# Altium PCB TG21_mach_nut_nhan _V1_ReV.PcbDoc (part 1 of 5)
Units mm, origin at the board's own origin, x right, y up, seen from the top; angles counter-clockwise.
Board outline 300 x 245 mm, 2 copper layers (Top Layer, Bottom Layer), stack 1.671 mm thick; 534 components, 407 nets, 1677 pads, 2608 vias.
Unrouted connection lines stored in the file: 3.
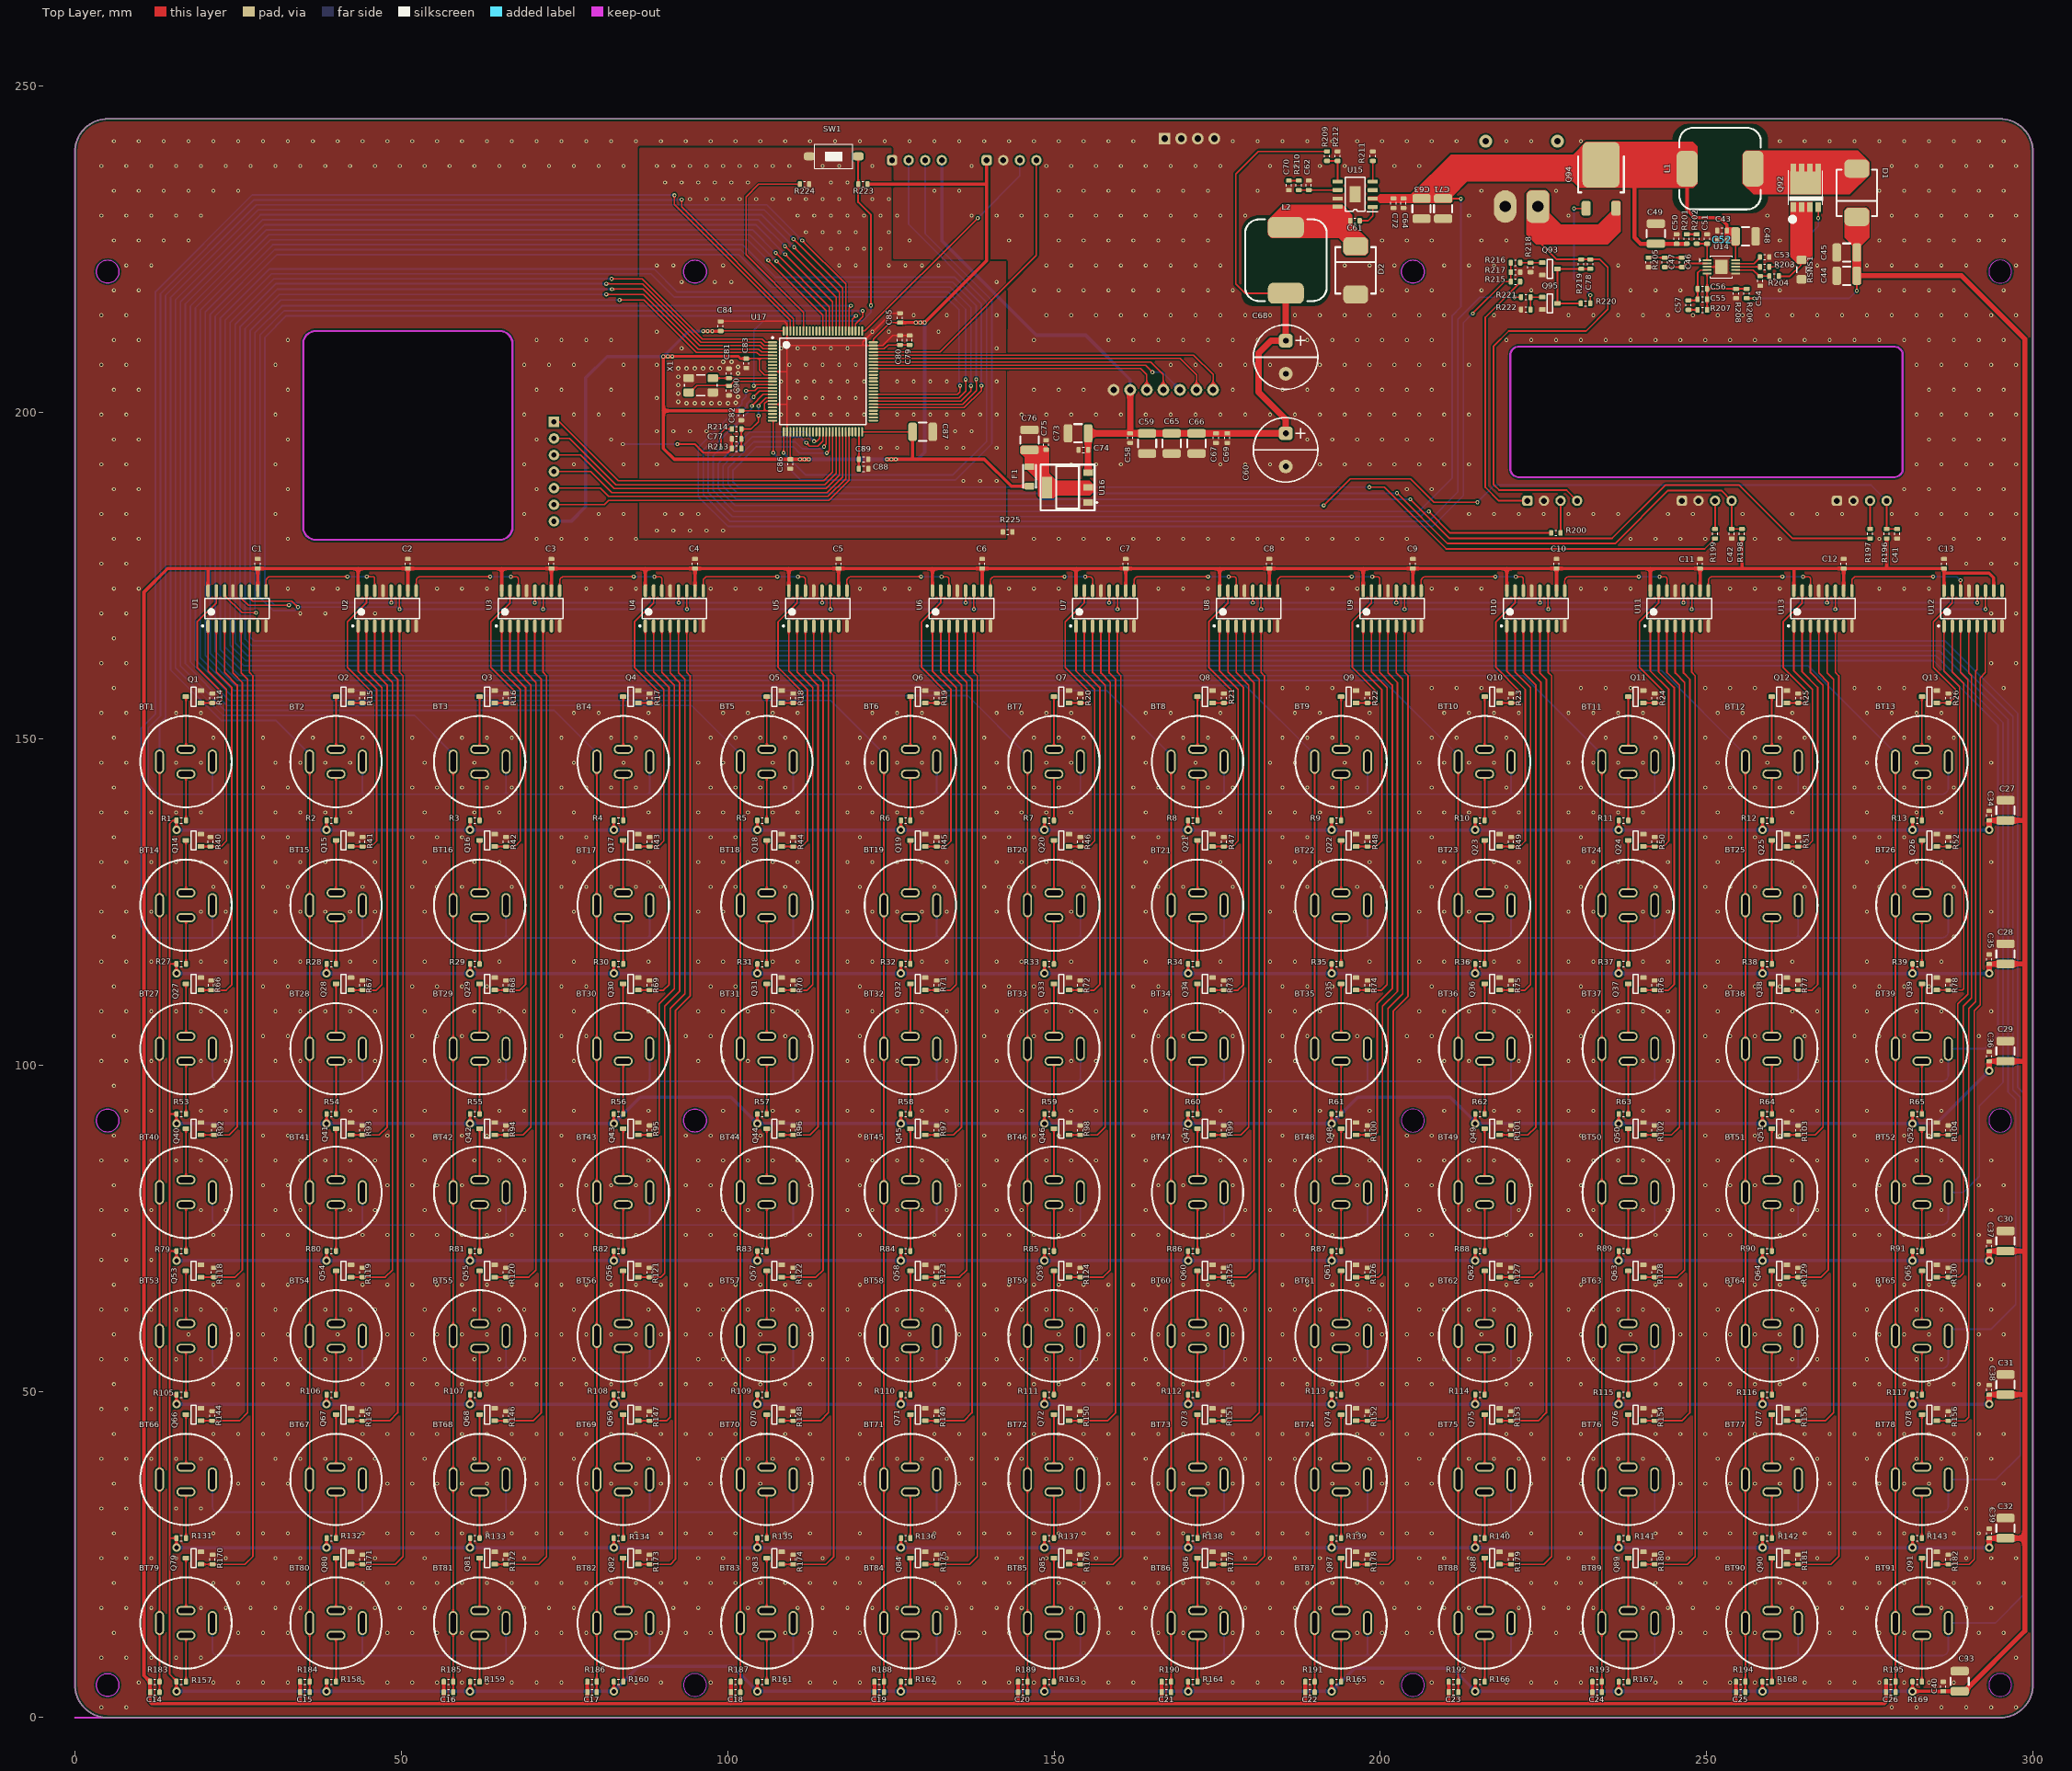
[diagram p0: Top Layer view]
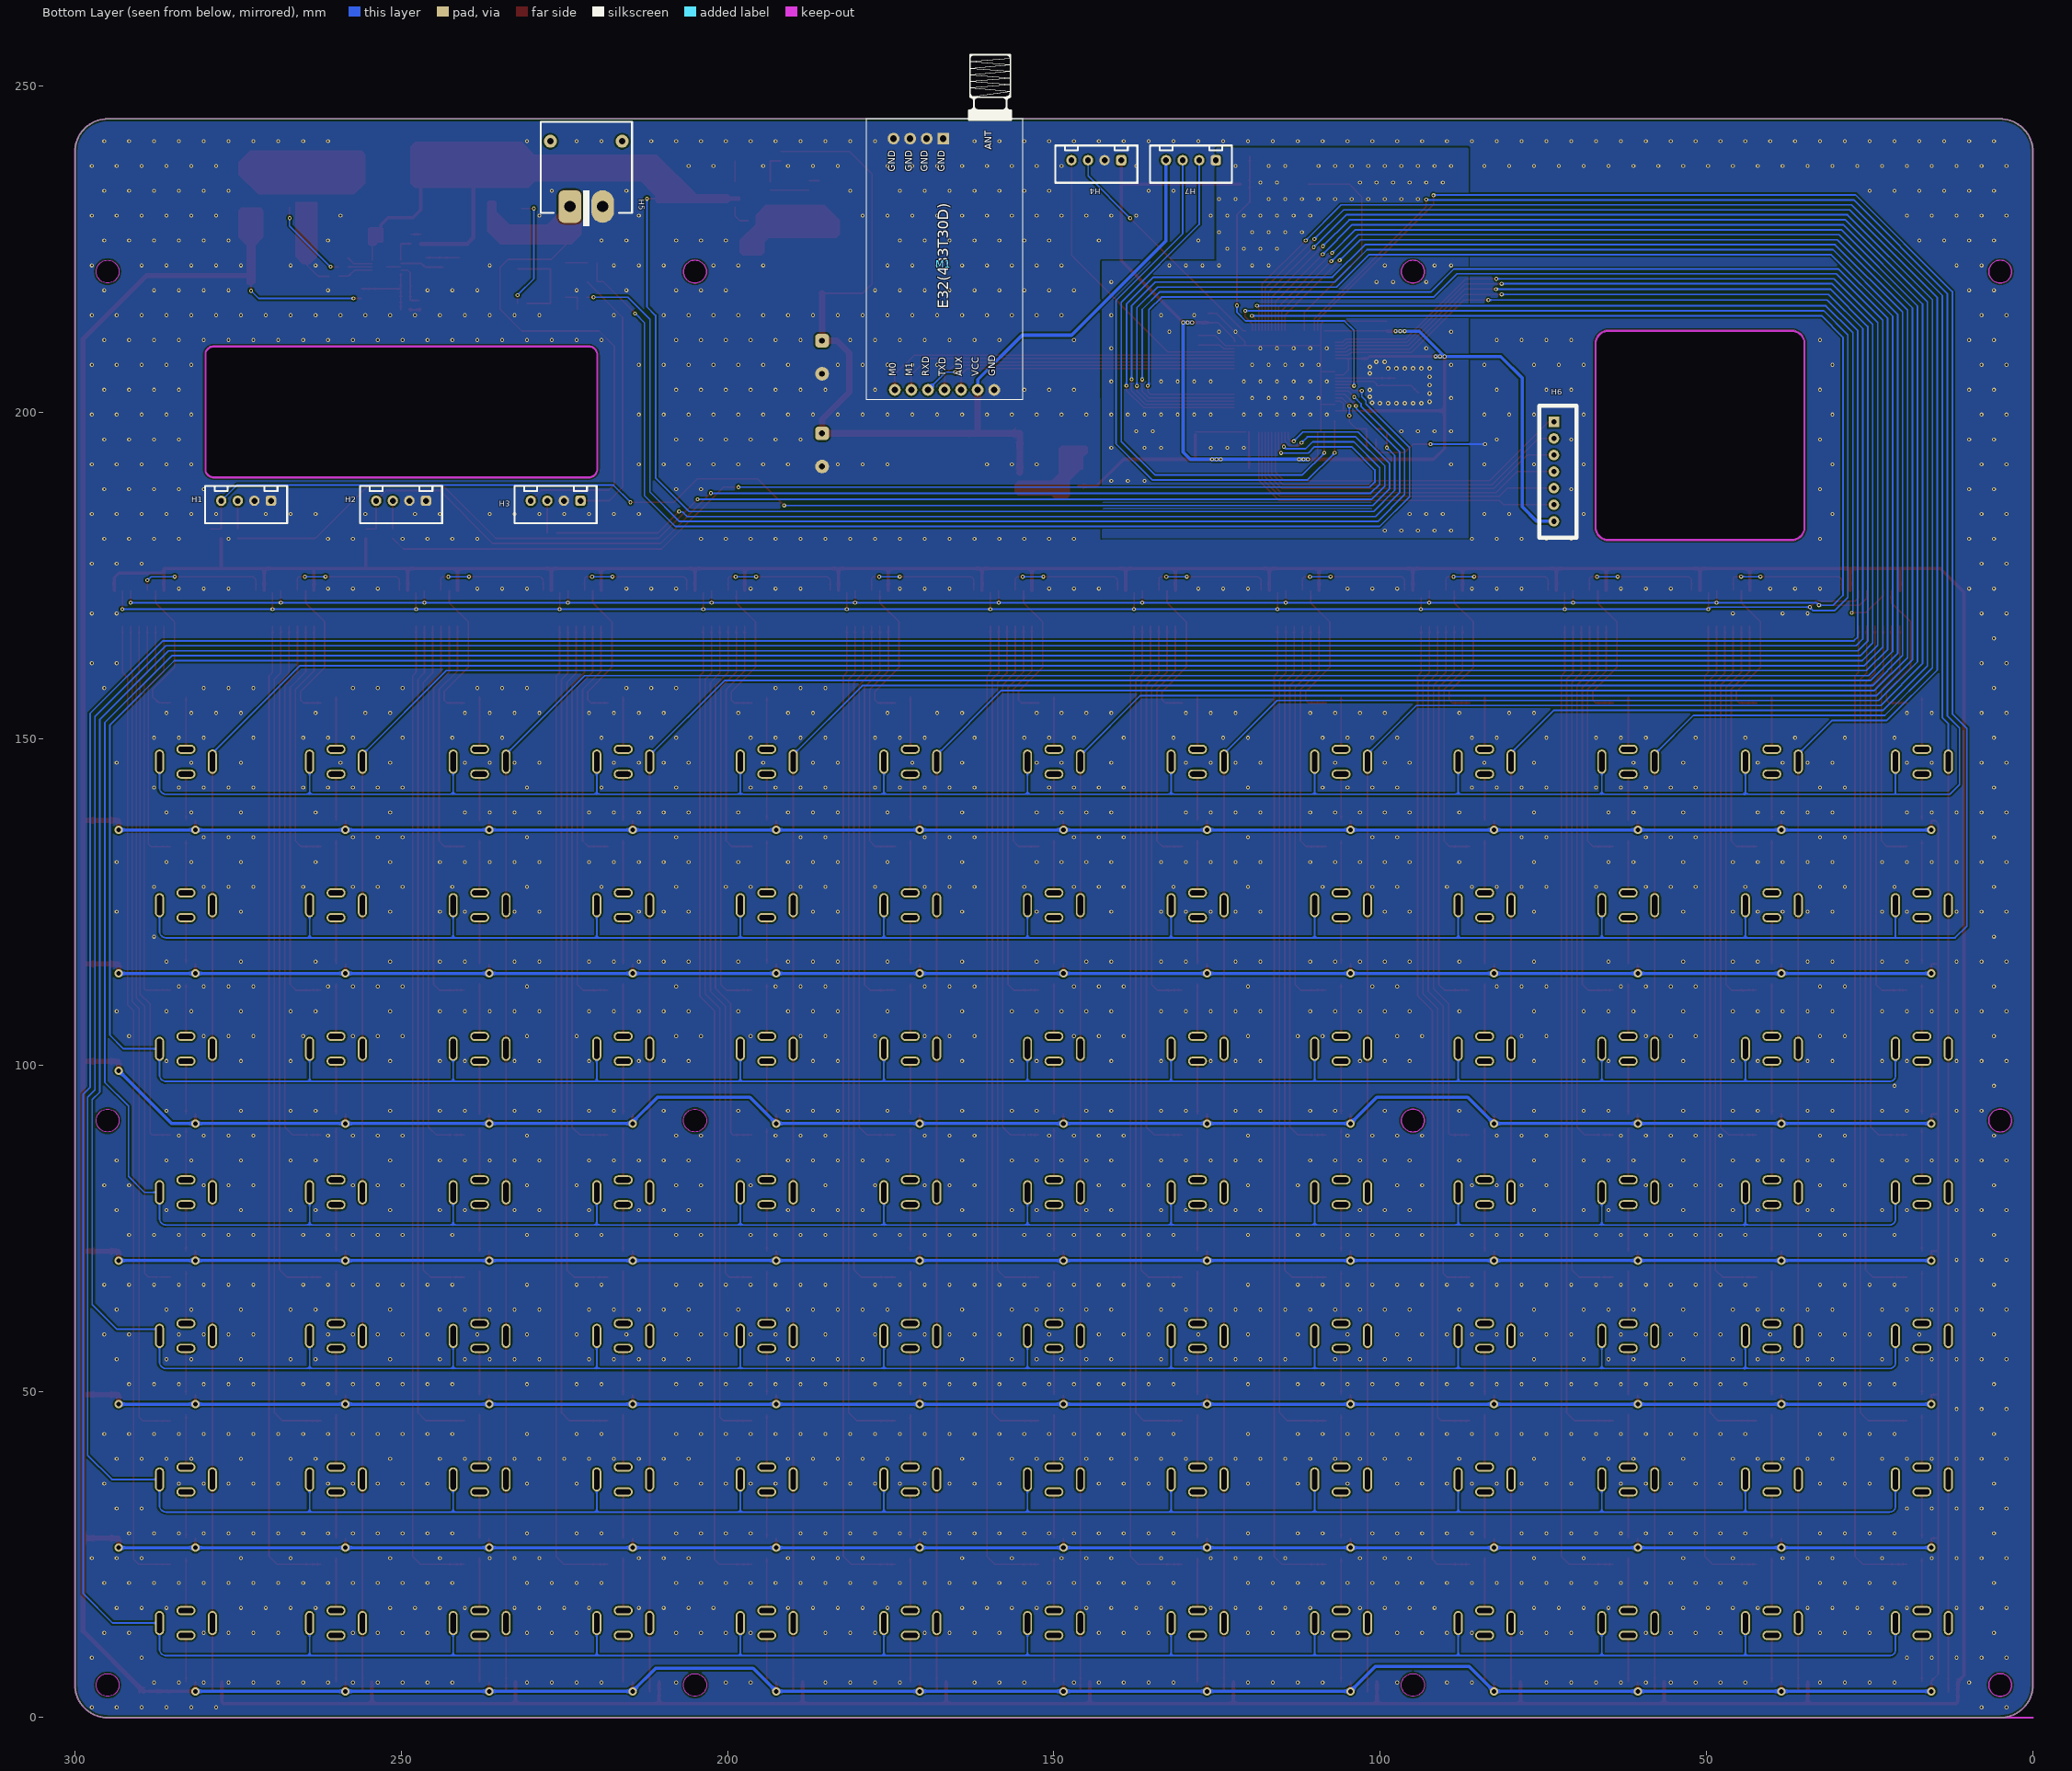
[diagram p1: Bottom Layer view, seen from below]
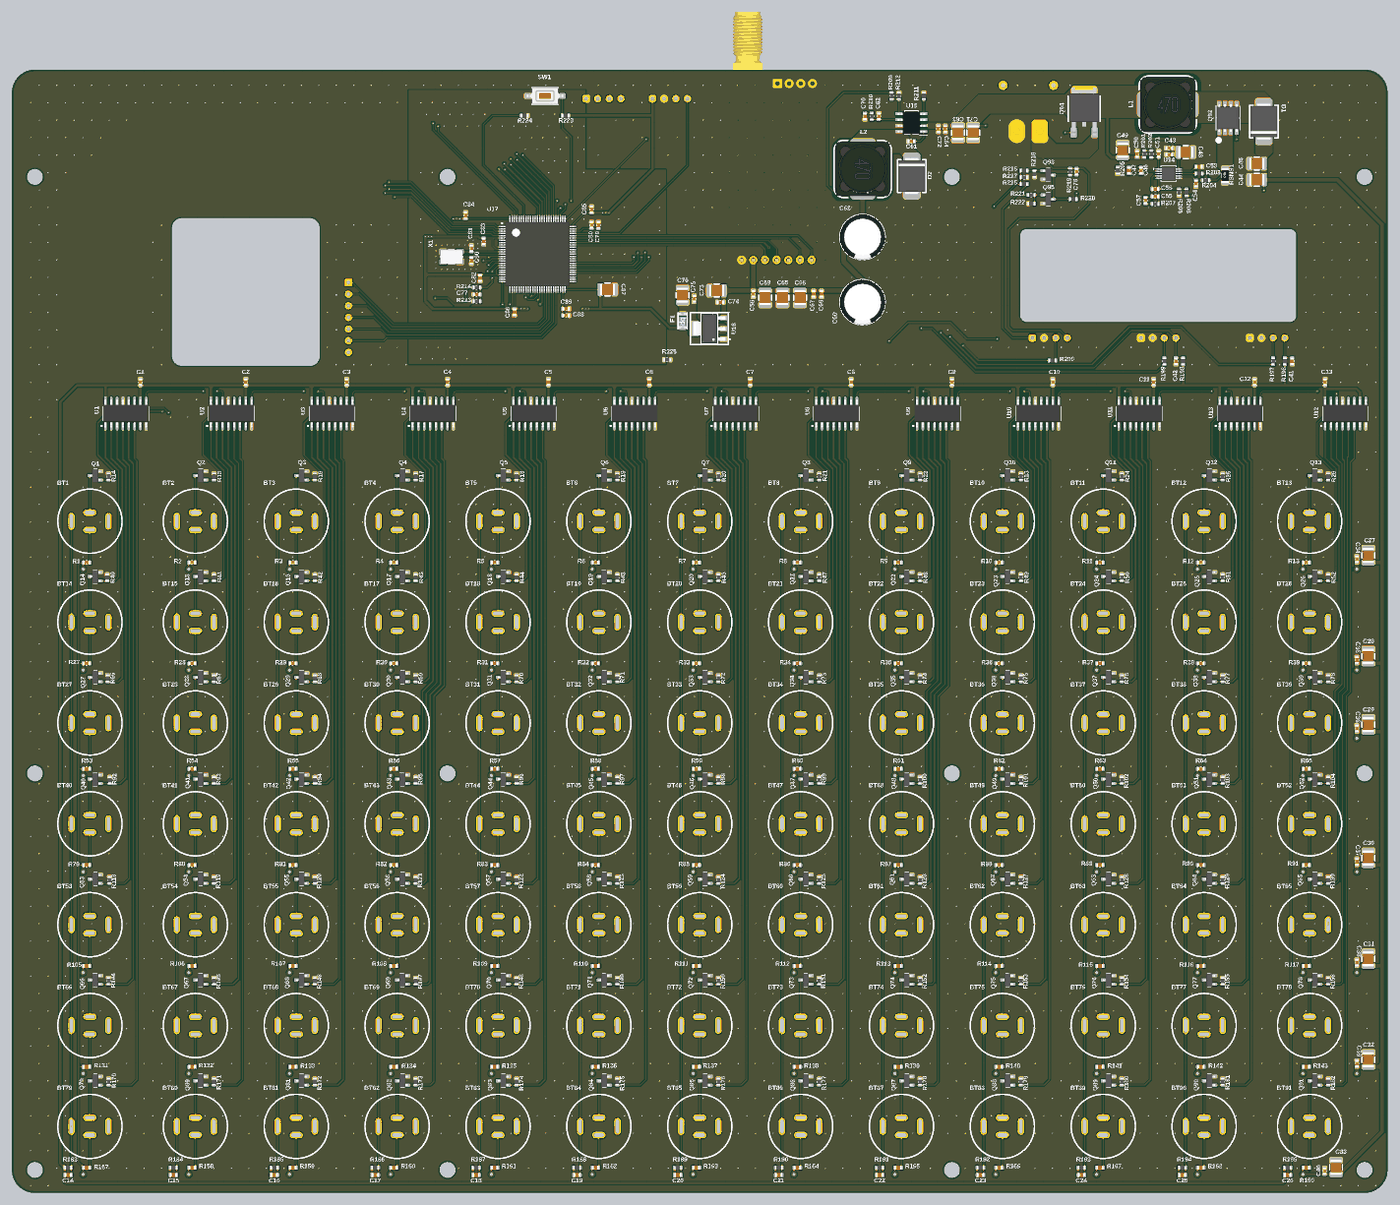
[diagram p6: 3D render of the assembled board from above, using the file's embedded part models]
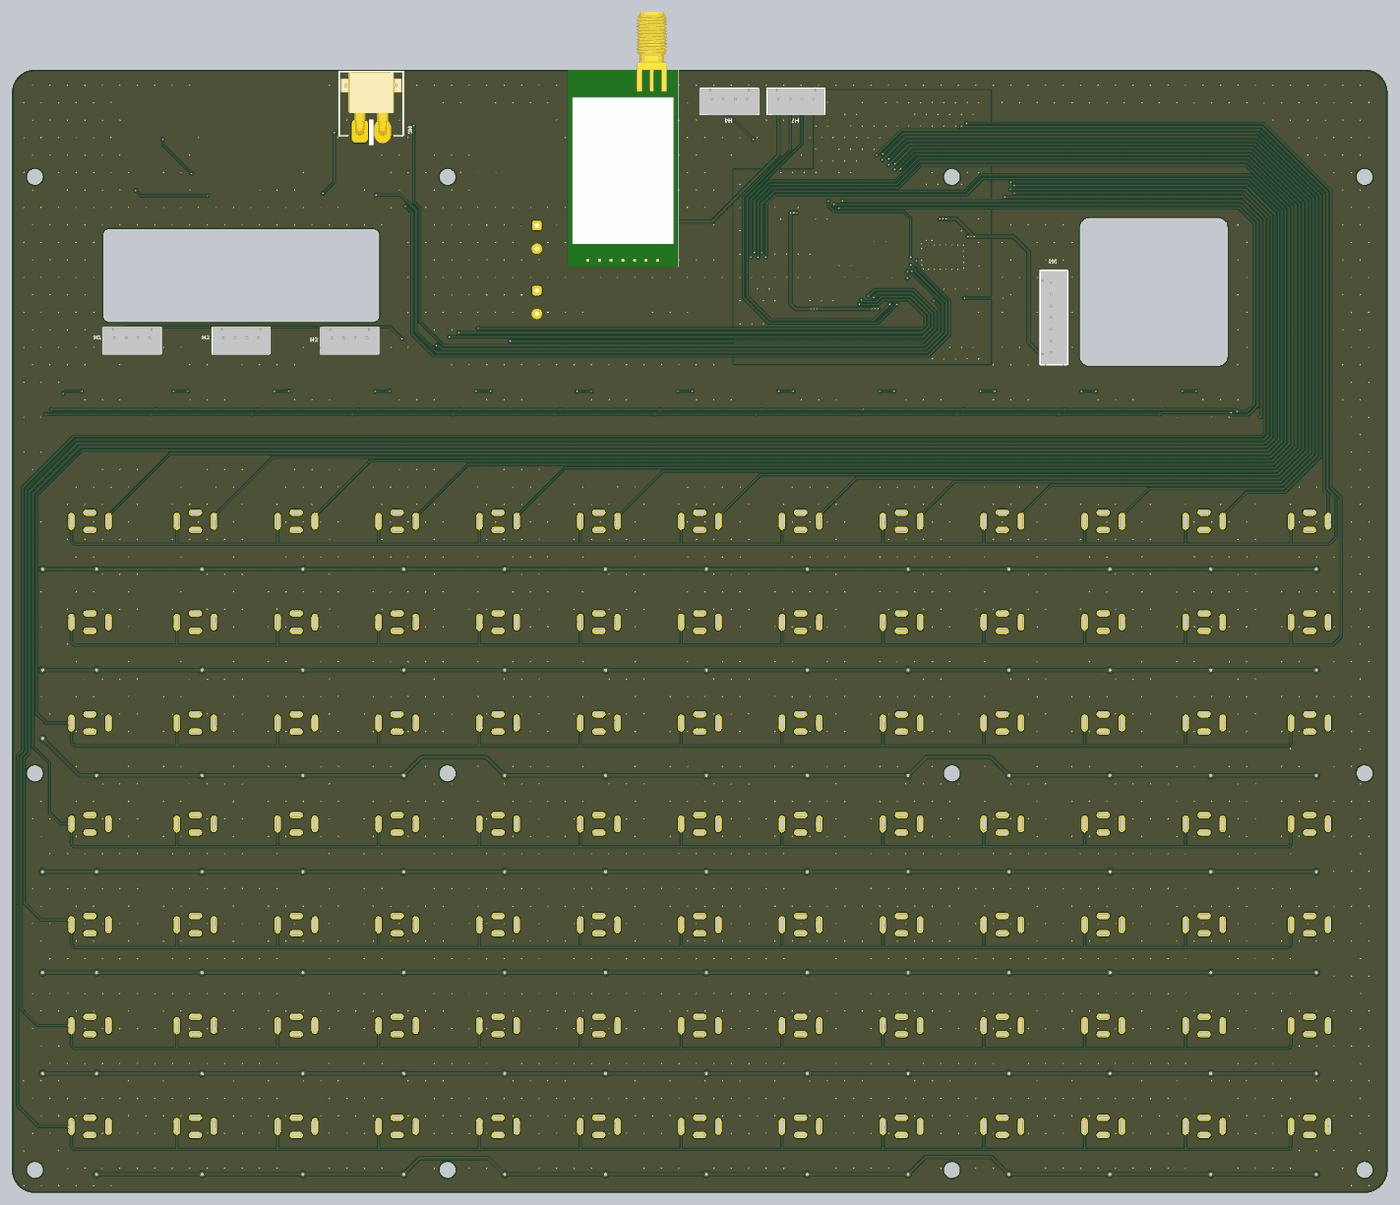
[diagram p7: 3D render of the assembled board from below, using the file's embedded part models]

## Layer stack, top to bottom
Top Solder: solder mask 0.0102, Solder Resist, Dk 3.5
Top Layer: signal copper 0.0356
Dielectric 1: dielectric 1.6, FR-4, Dk 4.8
Bottom Layer: signal copper 0.0356
Bottom Solder: solder mask 0.0102, Solder Resist, Dk 3.5

## Board outline
5,0 cw(c5,5) 0,5 0,240 cw(c5,240) 5,245 295,245 cw(c295,240) 300,240 300,5 cw(c295,5) 295,0
cut-out: 221.27,189.973 cw(c221.27,191.37) 219.873,191.37 219.873,208.83 cw(c221.27,208.83) 221.27,210.227 278.73,210.227 cw(c278.73,208.83) 280.127,208.83 280.127,191.37 cw(c278.73,191.37) 278.73,189.973
cut-out: 5,219.85 cw(c5,221.6) 3.25,221.6 cw(c5,221.6) 5,223.35 cw(c5,221.6) 6.75,221.6 cw(c5,221.6)
cut-out: 95,219.85 cw(c95,221.6) 93.25,221.6 cw(c95,221.6) 95,223.35 cw(c95,221.6) 96.75,221.6 cw(c95,221.6)
cut-out: 205,219.85 cw(c205,221.6) 203.25,221.6 cw(c205,221.6) 205,223.35 cw(c205,221.6) 206.75,221.6 cw(c205,221.6)
cut-out: 293.25,221.6 ccw(c295,221.6) 295,219.85 ccw(c295,221.6) 296.75,221.6 ccw(c295,221.6) 295,223.35 ccw(c295,221.6)
cut-out: 5,89.75 cw(c5,91.5) 3.25,91.5 cw(c5,91.5) 5,93.25 cw(c5,91.5) 6.75,91.5 cw(c5,91.5)
cut-out: 5,3.25 cw(c5,5) 3.25,5 cw(c5,5) 5,6.75 cw(c5,5) 6.75,5 cw(c5,5)
cut-out: 93.25,5 ccw(c95,5) 95,3.25 ccw(c95,5) 96.75,5 ccw(c95,5) 95,6.75 ccw(c95,5)
cut-out: 203.25,5 ccw(c205,5) 205,3.25 ccw(c205,5) 206.75,5 ccw(c205,5) 205,6.75 ccw(c205,5)
cut-out: 293.25,5 ccw(c295,5) 295,3.25 ccw(c295,5) 296.75,5 ccw(c295,5) 295,6.75 ccw(c295,5)
cut-out: 293.25,91.5 ccw(c295,91.5) 295,89.75 ccw(c295,91.5) 296.75,91.5 ccw(c295,91.5) 295,93.25 ccw(c295,91.5)
cut-out: 203.25,91.5 ccw(c205,91.5) 205,89.75 ccw(c205,91.5) 206.75,91.5 ccw(c205,91.5) 205,93.25 ccw(c205,91.5)
cut-out: 95,89.75 cw(c95,91.5) 93.25,91.5 cw(c95,91.5) 95,93.25 cw(c95,91.5) 96.75,91.5 cw(c95,91.5)
cut-out: 37,180.373 cw(c37,182.5) 34.873,182.5 34.873,210.5 cw(c37,210.5) 37,212.627 65,212.627 cw(c65,210.5) 67.127,210.5 67.127,182.5 cw(c65,182.5) 65,180.373

## Design rules (kind name [scope] priority, off if disabled: settings)
BoardOutlineClearance [All] p1: gap=0.2 ignorepadtopadclearanceinfootprint=FALSE
Clearance [All] p1: gap=0.254 ignorepadtopadclearanceinfootprint=FALSE
ComponentClearance [All] p1: gap=0.127 collisioncheckmode=3 verticalgap=0.127 showdistances=TRUE
DiffPairsRouting [All] p1: maxlimit=0.254 minlimit=0.127 mostfreqgap=0.127 toplayer_minwidth=0.127 toplayer_maxwidth=25.4 toplayer_prefwidth=0.127 bottomlayer_minwidth=0.127 bottomlayer_maxwidth=25.4 bottomlayer_prefwidth=0.127 maxuncoupledlength=12.7
Height [All] p1: minheight=0 maxheight=1816.048 prefheight=12.7
HoleSize [All] p1: absolutevalues=TRUE maxlimit=6.3 minlimit=0.3 maxpercent=80.000 minpercent=20.000
HoleToHoleClearance [All] p1: gap=0.25 allowstackedmicrovias=FALSE
MinimumAnnularRing [All] p1: minimumring=0.076
MinimumSolderMaskSliver [All] p1: minsoldermaskwidth=0
PlaneClearance [All] p1: clearance=0.127
PlaneConnect PlaneConnectPowerPads [InPadClass('PowerPads')] p1: planeconnectstyle=Direct reliefexpansion=0.508 reliefentries=4 reliefconductorwidth=0.254 reliefairgap=0.254
PlaneConnect [All] p2: pad.planeconnectstyle=Relief pad.reliefexpansion=0.3 pad.reliefentries=4 pad.reliefconductorwidth=0.127 pad.reliefairgap=0.127 via.planeconnectstyle=Direct via.reliefexpansion=0.3 via.reliefentries=4 via.reliefconductorwidth=0.127 via.reliefairgap=0.127
PolygonConnect PolygonConnectPowerPads [All vs (InPadClass('PowerPads'))] p1: connectstyle=Direct reliefconductorwidth=0.254 reliefentries=4 polygonreliefangle="90 Angle" airgapwidth=0.254
PolygonConnect [All] p2: connectstyle=Direct reliefconductorwidth=0.127 reliefentries=4 polygonreliefangle="90 Angle" airgapwidth=0.127
RoutingVias [All] p1: holewidth=0.3 width=0.6 viastyle="Through Hole" minholewidth=0.3 minwidth=0.6 maxholewidth=0.6 maxwidth=6.6
SilkToSilkClearance [All] p1: silktosilkclearance=0
SilkToSolderMaskClearance [IsPad] p1: minsilkscreentomaskgap=0.127 clearancetoexposedcopper=TRUE
SolderMaskExpansion [All] p1: expansion=0.075 istentingtop=FALSE
Width [All] p1: maxlimit=25.4 minlimit=0.127 preferedwidth=0.127 minimp=50.000000 maximp=50.000000 favimp=50.000000
20 further rules are at their usual default settings.

## Classes and differential pairs
component class "TG21_TX_Xu ly ma tran phim": C43 C44 C45 C46 C47 C48 C49 C50 C51 C52 C53 C54 C55 C56 C57 C58 C59 C60 C61 C62 C63 C64 C65 C66 C67 C68 C69 C70 C71 C72 C73 C74 C75 C76 C77 C78 C79 C80 C81 C82 C83 C84 C85 C86 C87 C88 C89 C90 D1 D2 F1 H4 H5 H6 H7 L1 L2 M1 Q92 Q93 Q94 Q95 R201 R203 R205 R206 R207 R208 R209 R210 R211 R212 R213 R214 R215 R216 R217 R218 R219 R220 R221 R222 R223 R224 R225 RSNS1 SW1 U14 U15 U16 U17 X1
component class "TG21_mach_nut_nhan _V1_ReV": BT1 BT2 BT3 BT4 BT5 BT6 BT7 BT8 BT9 BT10 BT11 BT12 BT13 BT14 BT15 BT16 BT17 BT18 BT19 BT20 BT21 BT22 BT23 BT24 BT25 BT26 BT27 BT28 BT29 BT30 BT31 BT32 BT33 BT34 BT35 BT36 BT37 BT38 BT39 BT40 BT41 BT42 BT43 BT44 BT45 BT46 BT47 BT48 BT49 BT50 BT51 BT52 BT53 BT54 BT55 BT56 BT57 BT58 BT59 BT60 BT61 BT62 BT63 BT64 BT65 BT66 BT67 BT68 BT69 BT70 BT71 BT72 BT73 BT74 BT75 BT76 BT77 BT78 BT79 BT80 BT81 BT82 BT83 BT84 BT85 BT86 BT87 BT88 BT89 BT90 BT91 C1 C2 C3 C4 C5 C6 C7 C8 C9 C10 C11 C12 C13 C14 C15 C16 C17 C18 C19 C20 C21 C22 C23 C24 C25 C26 C27 C28 C29 C30 C31 C32 C33 C34 C35 C36 C37 C38 C39 C40 C41 C42 H1 H2 H3 Q1 Q2 Q3 Q4 Q5 Q6 Q7 Q8 Q9 Q10 Q11 Q12 Q13 Q14 Q15 Q16 Q17 Q18 Q19 Q20 Q21 Q22 Q23 Q24 Q25 Q26 Q27 Q28 Q29 Q30 Q31 Q32 Q33 Q34 Q35 Q36 Q37 Q38 Q39 Q40 Q41 Q42 Q43 Q44 Q45 Q46 Q47 Q48 Q49 Q50 Q51 Q52 Q53 Q54 Q55 Q56 Q57 Q58 Q59 Q60 Q61 Q62 Q63 Q64 Q65 Q66 Q67 Q68 Q69 Q70 Q71 Q72 Q73 Q74 Q75 Q76 Q77 Q78 Q79 Q80 Q81 Q82 Q83 Q84 Q85 Q86 Q87 Q88 Q89 Q90 Q91 R1 R2 R3 R4 R5 R6 R7 R8 R9 R10 R14 R18 R19 R23 R25 R27 R29 R31 R32 R33 R34 R36 R66 R68 R70 R72 R74 R76 R78 R80 R82 R84 R86 R88 R118 R120 R122 R124 R126 R128 R130 R132 R134 R136 R138 R140 R161 R163 R165 R181 R183 R185 R187 R189 R191 R193 R195 R197 R199 R201 R203 R205 R206 R207 R208 R209 R210 R211 R212 R213 R214 R215 R216 R217 R218 R219 R220 R221 R223 R225 U1 U2 U3 U4 U5 U6 U7 U8 U9 U10 U11 U12 U13

## Components (designator, comment, footprint, x,y, rotation, side; value= is the part's Value field where it differs from the comment)
BT1 "BUTTON" "Metal Push Button Switch" 17,146.5 r90 top
BT2 "BUTTON" "Metal Push Button Switch" 40,146.5 r90 top
BT3 "BUTTON" "Metal Push Button Switch" 62,146.5 r90 top
BT4 "BUTTON" "Metal Push Button Switch" 84,146.5 r90 top
BT5 "BUTTON" "Metal Push Button Switch" 106,146.5 r90 top
BT6 "BUTTON" "Metal Push Button Switch" 128,146.5 r90 top
BT7 "BUTTON" "Metal Push Button Switch" 150,146.5 r90 top
BT8 "BUTTON" "Metal Push Button Switch" 172,146.5 r90 top
BT9 "BUTTON" "Metal Push Button Switch" 194,146.5 r90 top
BT10 "BUTTON" "Metal Push Button Switch" 216,146.5 r90 top
BT11 "BUTTON" "Metal Push Button Switch" 238,146.5 r90 top
BT12 "BUTTON" "Metal Push Button Switch" 260,146.5 r90 top
BT13 "BUTTON" "Metal Push Button Switch" 283,146.5 r90 top
BT14 "BUTTON" "Metal Push Button Switch" 17,124.5 r90 top
BT15 "BUTTON" "Metal Push Button Switch" 40,124.5 r90 top
BT16 "BUTTON" "Metal Push Button Switch" 62,124.5 r90 top
BT17 "BUTTON" "Metal Push Button Switch" 84,124.5 r90 top
BT18 "BUTTON" "Metal Push Button Switch" 106,124.5 r90 top
BT19 "BUTTON" "Metal Push Button Switch" 128,124.5 r90 top
BT20 "BUTTON" "Metal Push Button Switch" 150,124.5 r90 top
BT21 "BUTTON" "Metal Push Button Switch" 172,124.5 r90 top
BT22 "BUTTON" "Metal Push Button Switch" 194,124.5 r90 top
BT23 "BUTTON" "Metal Push Button Switch" 216,124.5 r90 top
BT24 "BUTTON" "Metal Push Button Switch" 238,124.5 r90 top
BT25 "BUTTON" "Metal Push Button Switch" 260,124.5 r90 top
BT26 "BUTTON" "Metal Push Button Switch" 283,124.5 r90 top
BT27 "BUTTON" "Metal Push Button Switch" 17,102.5 r90 top
BT28 "BUTTON" "Metal Push Button Switch" 40,102.5 r90 top
BT29 "BUTTON" "Metal Push Button Switch" 62,102.5 r90 top
BT30 "BUTTON" "Metal Push Button Switch" 84,102.5 r90 top
BT31 "BUTTON" "Metal Push Button Switch" 106,102.5 r90 top
BT32 "BUTTON" "Metal Push Button Switch" 128,102.5 r90 top
BT33 "BUTTON" "Metal Push Button Switch" 150,102.5 r90 top
BT34 "BUTTON" "Metal Push Button Switch" 172,102.5 r90 top
BT35 "BUTTON" "Metal Push Button Switch" 194,102.5 r90 top
BT36 "BUTTON" "Metal Push Button Switch" 216,102.5 r90 top
BT37 "BUTTON" "Metal Push Button Switch" 238,102.5 r90 top
BT38 "BUTTON" "Metal Push Button Switch" 260,102.5 r90 top
BT39 "BUTTON" "Metal Push Button Switch" 283,102.5 r90 top
BT40 "BUTTON" "Metal Push Button Switch" 17,80.5 r90 top
BT41 "BUTTON" "Metal Push Button Switch" 40,80.5 r90 top
BT42 "BUTTON" "Metal Push Button Switch" 62,80.5 r90 top
BT43 "BUTTON" "Metal Push Button Switch" 84,80.5 r90 top
BT44 "BUTTON" "Metal Push Button Switch" 106,80.5 r90 top
BT45 "BUTTON" "Metal Push Button Switch" 128,80.5 r90 top
BT46 "BUTTON" "Metal Push Button Switch" 150,80.5 r90 top
BT47 "BUTTON" "Metal Push Button Switch" 172,80.5 r90 top
BT48 "BUTTON" "Metal Push Button Switch" 194,80.5 r90 top
BT49 "BUTTON" "Metal Push Button Switch" 216,80.5 r90 top
BT50 "BUTTON" "Metal Push Button Switch" 238,80.5 r90 top
BT51 "BUTTON" "Metal Push Button Switch" 260,80.5 r90 top
BT52 "BUTTON" "Metal Push Button Switch" 283,80.5 r90 top
BT53 "BUTTON" "Metal Push Button Switch" 17,58.5 r90 top
BT54 "BUTTON" "Metal Push Button Switch" 40,58.5 r90 top
BT55 "BUTTON" "Metal Push Button Switch" 62,58.5 r90 top
BT56 "BUTTON" "Metal Push Button Switch" 84,58.5 r90 top
BT57 "BUTTON" "Metal Push Button Switch" 106,58.5 r90 top
BT58 "BUTTON" "Metal Push Button Switch" 128,58.5 r90 top
BT59 "BUTTON" "Metal Push Button Switch" 150,58.5 r90 top
BT60 "BUTTON" "Metal Push Button Switch" 172,58.5 r90 top
BT61 "BUTTON" "Metal Push Button Switch" 194,58.5 r90 top
BT62 "BUTTON" "Metal Push Button Switch" 216,58.5 r90 top
BT63 "BUTTON" "Metal Push Button Switch" 238,58.5 r90 top
BT64 "BUTTON" "Metal Push Button Switch" 260,58.5 r90 top
BT65 "BUTTON" "Metal Push Button Switch" 283,58.5 r90 top
BT66 "BUTTON" "Metal Push Button Switch" 17,36.5 r90 top
BT67 "BUTTON" "Metal Push Button Switch" 40,36.5 r90 top
BT68 "BUTTON" "Metal Push Button Switch" 62,36.5 r90 top
BT69 "BUTTON" "Metal Push Button Switch" 84,36.5 r90 top
BT70 "BUTTON" "Metal Push Button Switch" 106,36.5 r90 top
BT71 "BUTTON" "Metal Push Button Switch" 128,36.5 r90 top
BT72 "BUTTON" "Metal Push Button Switch" 150,36.5 r90 top
BT73 "BUTTON" "Metal Push Button Switch" 172,36.5 r90 top
BT74 "BUTTON" "Metal Push Button Switch" 194,36.5 r90 top
BT75 "BUTTON" "Metal Push Button Switch" 216,36.5 r90 top
BT76 "BUTTON" "Metal Push Button Switch" 238,36.5 r90 top
BT77 "BUTTON" "Metal Push Button Switch" 260,36.5 r90 top
BT78 "BUTTON" "Metal Push Button Switch" 283,36.5 r90 top
BT79 "BUTTON" "Metal Push Button Switch" 17,14.5 r90 top
BT80 "BUTTON" "Metal Push Button Switch" 40,14.5 r90 top
BT81 "BUTTON" "Metal Push Button Switch" 62,14.5 r90 top
BT82 "BUTTON" "Metal Push Button Switch" 84,14.5 r90 top
BT83 "BUTTON" "Metal Push Button Switch" 106,14.5 r90 top
BT84 "BUTTON" "Metal Push Button Switch" 128,14.5 r90 top
BT85 "BUTTON" "Metal Push Button Switch" 150,14.5 r90 top
BT86 "BUTTON" "Metal Push Button Switch" 172,14.5 r90 top
BT87 "BUTTON" "Metal Push Button Switch" 194,14.5 r90 top
BT88 "BUTTON" "Metal Push Button Switch" 216,14.5 r90 top
BT89 "BUTTON" "Metal Push Button Switch" 238,14.5 r90 top
BT90 "BUTTON" "Metal Push Button Switch" 260,14.5 r90 top
BT91 "BUTTON" "Metal Push Button Switch" 283,14.5 r90 top
C1 "100nF" "0603 MLCC" 28.005,176.835 r270 top
C2 "100nF" "0603 MLCC" 51.005,176.835 r270 top
C3 "100nF" "0603 MLCC" 73.005,176.835 r270 top
C4 "100nF" "0603 MLCC" 95.005,176.835 r270 top
C5 "100nF" "0603 MLCC" 117.005,176.835 r270 top
C6 "100nF" "0603 MLCC" 139.005,176.835 r270 top
C7 "100nF" "0603 MLCC" 161.005,176.835 r270 top
C8 "100nF" "0603 MLCC" 183.005,176.835 r270 top
C9 "100nF" "0603 MLCC" 205.005,176.835 r270 top
C10 "100nF" "0603 MLCC" 227.005,176.835 r270 top
C11 "100nF" "0603 MLCC" 249.005,176.835 r270 top
C12 "100nF" "0603 MLCC" 271.005,176.835 r270 top
C13 "100nF" "0603 MLCC" 286.385,176.835 r270 top
C14 "100nF" "0603 MLCC" 12.227,3.894 r0 top
C15 "100nF" "0603 MLCC" 35.225,3.894 r0 top
C16 "100nF" "0603 MLCC" 57.225,3.894 r0 top
C17 "100nF" "0603 MLCC" 79.225,3.894 r0 top
C18 "100nF" "0603 MLCC" 101.225,3.894 r0 top
C19 "100nF" "0603 MLCC" 123.225,3.894 r0 top
C20 "100nF" "0603 MLCC" 145.225,3.894 r0 top
C21 "100nF" "0603 MLCC" 167.225,3.894 r0 top
C22 "100nF" "0603 MLCC" 189.225,3.894 r0 top
C23 "100nF" "0603 MLCC" 211.225,3.894 r0 top
C24 "100nF" "0603 MLCC" 233.225,3.894 r0 top
C25 "100nF" "0603 MLCC" 255.225,3.894 r0 top
C26 "100nF" "0603 MLCC" 278.225,3.894 r0 top
C27 "22uF/25V" "1210 CAPACITOR" 295.81,139.042 r270 top
C28 "22uF/25V" "1210 CAPACITOR" 295.81,117.042 r270 top
C29 "22uF/25V" "1210 CAPACITOR" 295.81,102.142 r270 top
C30 "22uF/25V" "1210 CAPACITOR" 295.81,73.042 r270 top
C31 "22uF/25V" "1210 CAPACITOR" 295.81,51.042 r270 top
C32 "22uF/25V" "1210 CAPACITOR" 295.81,29.042 r270 top
C33 "22uF/25V" "1210 CAPACITOR" 288.774,5.583 r270 top
C34 "100nF" "0603 MLCC" 293.306,138.225 r270 top
C35 "100nF" "0603 MLCC" 293.306,116.225 r270 top
C36 "100nF" "0603 MLCC" 293.306,101.325 r270 top
C37 "100nF" "0603 MLCC" 293.306,72.225 r270 top
C38 "100nF" "0603 MLCC" 293.306,50.225 r270 top
C39 "100nF" "0603 MLCC" 293.306,28.225 r270 top
C40 "100nF" "0603 MLCC" 286.27,4.766 r270 top
C41 "100nF" "0603 MLCC" 279.203,181.426 r270 top
C42 "100nF" "0603 MLCC" 253.848,181.426 r270 top
C43 "100nF" "0603 MLCC" 252.382,227.882 r180 top
C44 "10uF 50V" "1210 CAPACITOR" 271.483,220.962 r0 top
C45 "10uF 50V" "1210 CAPACITOR" 271.483,224.518 r0 top
C46 "100nF" "0603 MLCC" 246.227,223.012 r90 top
C47 "100nF" "0603 MLCC" 243.599,223.012 r90 top
C48 "10uF 50V" "1210 CAPACITOR" 255.983,227 r180 top
C49 "10uF 50V" "1210 CAPACITOR" 242.234,227.419 r270 top
C50 "100nF" "0603 MLCC" 245.409,226.602 r90 top
C51 "100pF" "0603 MLCC" 250.083,226.602 r270 top
C52 "100nF" "0603 MLCC" 252.382,226.485 r0 top
C53 "1uF" "0603 MLCC" 258.897,223.835 r0 top
C54 "100pF" "0603 MLCC" 258.226,220.171 r90 top
C55 "100pF" "0603 MLCC" 249.358,217.353 r0 top
C56 "100pF" "0603 MLCC" 249.358,218.965 r0 top
C57 "10nF" "0603 MLCC" 247.213,216.469 r270 top
C58 "100nF" "0603 MLCC" 161.68,196.091 r90 top
C59 "22uF/25V" "1210 CAPACITOR" 164.27,195.274 r90 top
C60 "1000uF/35V" "10x20 5.0 Capacitor" 185.522,196.816 r270 top
C61 "100nF" "0603 MLCC" 196.125,229.387 r0 top
C62 "100pF" "0603 MLCC" 189.049,234.826 r270 top
C63 "22uF/25V" "1210 CAPACITOR" 206.327,231.259 r270 top
C64 "100nF" "0603 MLCC" 203.559,232.076 r270 top
C65 "22uF 25V" "1210 CAPACITOR" 168.045,195.274 r90 top
C66 "22uF 25V" "1210 CAPACITOR" 171.855,195.274 r90 top
C67 "100nF" "0603 MLCC" 174.83,196.091 r90 top
C68 "1000uF/35V" "10x20 5.0 Capacitor" 185.522,211.023 r270 top
C69 "100nF" "0603 MLCC" 176.562,196.091 r90 top
C70 "33pF" "0603 MLCC" 186.001,234.826 r90 top
C71 "22uF/25V" "1210 CAPACITOR" 209.629,231.259 r270 top
C72 "100nF" "0603 MLCC" 202.035,232.076 r90 top
C73 "22uF/25V" "1210 CAPACITOR" 153.698,196.823 r180 top
C74 "100nF" "0603 MLCC" 154.515,194.283 r0 top
C75 "100nF" "0603 MLCC" 148.794,195.045 r270 top
C76 "22uF/25V" "1210 CAPACITOR" 146.254,195.807 r90 top
C77 "100nF" "0603 MLCC" 101.372,195.961 r180 top
C78 "100nF" "0603 MLCC" 232.183,222.744 r90 top
C79 "1uF" "0603 MLCC" 127.891,211.087 r270 top
C80 "100nF" "0603 MLCC" 126.411,211.096 r270 top
C81 "22pF" "0603 MLCC" 100.203,206 r90 top
C82 "100nF" "0603 MLCC" 102.097,199.55 r90 top
C83 "100nF" "0603 MLCC" 102.87,207.55 r90 top
C84 "100nF" "0603 MLCC" 98.933,213.225 r270 top
C85 "100nF" "0603 MLCC" 126.411,214.503 r270 top
C86 "100nF" "0603 MLCC" 109.605,192.112 r90 top
C87 "22uF/25V" "1210 CAPACITOR" 129.888,197.05 r0 top
C88 "1uF" "0603 MLCC" 120.83,191.389 r180 top
C89 "100nF" "0603 MLCC" 120.83,192.837 r180 top
C90 "22pF" "0603 MLCC" 100.203,203.352 r270 top
D1 "B560C" SMC(DO-214AB) 273.025,233.688 r270 top
D2 "B560C" SMC(DO-214AB) 196.24,221.793 r90 top
F1 "1A 6V" "1206 - Fuse" 146.254,190.219 r270 top
H1 "XY-XH2.54-4PZZ" "XH2.54 - 4PZZ" 269.977,186.487 r0 bottom
H2 "XY-XH2.54-4PZZ" "XH2.54 - 4PZZ" 246.228,186.487 r0 bottom
H3 "XY-XH2.54-4PZZ" "XH2.54 - 4PZZ" 222.555,186.487 r0 bottom
H4 "XY-XH2.54-4PZZ" "XH2.54 - 4PZZ" 139.7,238.67 r0 bottom
H5 "XT30PW-M30.G.Y" XT30 224.154,231.579 r180 bottom
H6 "Header 7P 2.54 Duc Thang" XH2.54M-7 73.387,198.577 r270 bottom
H7 "XY-XH2.54-4PZZ" "XH2.54 - 4PZZ" 125.197,238.67 r0 bottom
L1 "10uH" 12.2x12.2mm 252.07,237.388 r0 top
L2 "10uH" 12.2x12.2mm 185.547,223.342 r270 top
M1 "E32 - 433T30D" "E32 - 433T30D" 174.384,203.486 r90 bottom
Q1 "SI2308A" SOT23_HVT 19.35,155.5 r90 top
Q2 "SI2308A" SOT23_HVT 42.35,155.5 r90 top
Q3 "SI2308A" SOT23_HVT 64.35,155.5 r90 top
Q4 "SI2308A" SOT23_HVT 86.35,155.5 r90 top
Q5 "SI2308A" SOT23_HVT 108.35,155.5 r90 top
Q6 "SI2308A" SOT23_HVT 130.35,155.5 r90 top
Q7 "SI2308A" SOT23_HVT 152.35,155.5 r90 top
Q8 "SI2308A" SOT23_HVT 174.35,155.5 r90 top
Q9 "SI2308A" SOT23_HVT 196.35,155.5 r90 top
Q10 "SI2308A" SOT23_HVT 218.35,155.5 r90 top
Q11 "SI2308A" SOT23_HVT 240.35,155.5 r90 top
Q12 "SI2308A" SOT23_HVT 262.35,155.5 r90 top
Q13 "SI2308A" SOT23_HVT 285.35,155.5 r90 top
Q14 "SI2308A" SOT23_HVT 19.35,133.5 r90 top
Q15 "SI2308A" SOT23_HVT 42.35,133.5 r90 top
Q16 "SI2308A" SOT23_HVT 64.35,133.5 r90 top
Q17 "SI2308A" SOT23_HVT 86.35,133.5 r90 top
Q18 "SI2308A" SOT23_HVT 108.35,133.5 r90 top
Q19 "SI2308A" SOT23_HVT 130.35,133.5 r90 top
Q20 "SI2308A" SOT23_HVT 152.35,133.5 r90 top
Q21 "SI2308A" SOT23_HVT 174.35,133.5 r90 top
Q22 "SI2308A" SOT23_HVT 196.35,133.5 r90 top
Q23 "SI2308A" SOT23_HVT 218.35,133.5 r90 top
Q24 "SI2308A" SOT23_HVT 240.35,133.5 r90 top
Q25 "SI2308A" SOT23_HVT 262.35,133.5 r90 top
Q26 "SI2308A" SOT23_HVT 285.35,133.5 r90 top
Q27 "SI2308A" SOT23_HVT 19.35,111.5 r90 top
Q28 "SI2308A" SOT23_HVT 42.35,111.5 r90 top
Q29 "SI2308A" SOT23_HVT 64.35,111.5 r90 top
Q30 "SI2308A" SOT23_HVT 86.35,111.5 r90 top
Q31 "SI2308A" SOT23_HVT 108.35,111.5 r90 top
Q32 "SI2308A" SOT23_HVT 130.35,111.5 r90 top
Q33 "SI2308A" SOT23_HVT 152.35,111.5 r90 top
Q34 "SI2308A" SOT23_HVT 174.35,111.5 r90 top
Q35 "SI2308A" SOT23_HVT 196.35,111.5 r90 top
Q36 "SI2308A" SOT23_HVT 218.35,111.5 r90 top
Q37 "SI2308A" SOT23_HVT 240.35,111.5 r90 top
Q38 "SI2308A" SOT23_HVT 262.35,111.5 r90 top
Q39 "SI2308A" SOT23_HVT 285.35,111.5 r90 top
Q40 "SI2308A" SOT23_HVT 19.35,89.3 r90 top
Q41 "SI2308A" SOT23_HVT 42.35,89.3 r90 top
Q42 "SI2308A" SOT23_HVT 64.35,89.3 r90 top
Q43 "SI2308A" SOT23_HVT 86.35,89.3 r90 top
Q44 "SI2308A" SOT23_HVT 108.35,89.3 r90 top
Q45 "SI2308A" SOT23_HVT 130.35,89.3 r90 top
Q46 "SI2308A" SOT23_HVT 152.35,89.3 r90 top
Q47 "SI2308A" SOT23_HVT 174.35,89.3 r90 top
Q48 "SI2308A" SOT23_HVT 196.35,89.3 r90 top
Q49 "SI2308A" SOT23_HVT 218.35,89.3 r90 top
Q50 "SI2308A" SOT23_HVT 240.35,89.3 r90 top
Q51 "SI2308A" SOT23_HVT 262.35,89.3 r90 top
Q52 "SI2308A" SOT23_HVT 285.35,89.3 r90 top
Q53 "SI2308A" SOT23_HVT 19.35,67.5 r90 top
Q54 "SI2308A" SOT23_HVT 42.35,67.5 r90 top
Q55 "SI2308A" SOT23_HVT 64.35,67.5 r90 top
Q56 "SI2308A" SOT23_HVT 86.35,67.5 r90 top
Q57 "SI2308A" SOT23_HVT 108.35,67.5 r90 top
Q58 "SI2308A" SOT23_HVT 130.35,67.5 r90 top
Q59 "SI2308A" SOT23_HVT 152.35,67.5 r90 top
Q60 "SI2308A" SOT23_HVT 174.35,67.5 r90 top
Q61 "SI2308A" SOT23_HVT 196.35,67.5 r90 top
Q62 "SI2308A" SOT23_HVT 218.35,67.5 r90 top
Q63 "SI2308A" SOT23_HVT 240.35,67.5 r90 top
Q64 "SI2308A" SOT23_HVT 262.35,67.5 r90 top
Q65 "SI2308A" SOT23_HVT 285.35,67.5 r90 top
Q66 "SI2308A" SOT23_HVT 19.35,45.5 r90 top
Q67 "SI2308A" SOT23_HVT 42.35,45.5 r90 top
Q68 "SI2308A" SOT23_HVT 64.35,45.5 r90 top
Q69 "SI2308A" SOT23_HVT 86.35,45.5 r90 top
Q70 "SI2308A" SOT23_HVT 108.35,45.5 r90 top
Q71 "SI2308A" SOT23_HVT 130.35,45.5 r90 top
Q72 "SI2308A" SOT23_HVT 152.35,45.5 r90 top
Q73 "SI2308A" SOT23_HVT 174.35,45.5 r90 top
Q74 "SI2308A" SOT23_HVT 196.35,45.5 r90 top
Q75 "SI2308A" SOT23_HVT 218.35,45.5 r90 top
Q76 "SI2308A" SOT23_HVT 240.35,45.5 r90 top
Q77 "SI2308A" SOT23_HVT 262.35,45.5 r90 top
Q78 "SI2308A" SOT23_HVT 285.35,45.5 r90 top
Q79 "SI2308A" SOT23_HVT 19.35,23.5 r90 top
Q80 "SI2308A" SOT23_HVT 42.35,23.5 r90 top
Q81 "SI2308A" SOT23_HVT 64.35,23.5 r90 top
Q82 "SI2308A" SOT23_HVT 86.35,23.5 r90 top
Q83 "SI2308A" SOT23_HVT 108.35,23.5 r90 top
Q84 "SI2308A" SOT23_HVT 130.35,23.5 r90 top
Q85 "SI2308A" SOT23_HVT 152.35,23.5 r90 top
Q86 "SI2308A" SOT23_HVT 174.35,23.5 r90 top
Q87 "SI2308A" SOT23_HVT 196.35,23.5 r90 top
Q88 "SI2308A" SOT23_HVT 218.35,23.5 r90 top
Q89 "SI2308A" SOT23_HVT 240.35,23.5 r90 top
Q90 "SI2308A" SOT23_HVT 262.35,23.5 r90 top
Q91 "SI2308A" SOT23_HVT 285.35,23.5 r90 top
Q92 "TPH3R70APL" "SOP Advanced" 265.192,234.444 r270 top
Q93 "MMBT2222A SOT23" SOT23_HVT 224.79,222.969 r270 top
Q94 "IRFR5410" "TO - 252" 233.832,235.483 r0 top
Q95 "MMBT2222A SOT23" SOT23_HVT 224.79,217.688 r270 top
R1 "220R" "0603 MLCC" 16.275,137.5 r0 top
R2 "220R" "0603 MLCC" 39.275,137.5 r0 top
R3 "220R" "0603 MLCC" 61.275,137.5 r0 top
R4 "220R" "0603 MLCC" 83.275,137.5 r0 top
R5 "220R" "0603 MLCC" 105.275,137.5 r0 top
R6 "220R" "0603 MLCC" 127.275,137.5 r0 top
R7 "220R" "0603 MLCC" 149.275,137.5 r0 top
R8 "220R" "0603 MLCC" 171.275,137.5 r0 top
R9 "220R" "0603 MLCC" 193.275,137.5 r0 top
R10 "220R" "0603 MLCC" 215.275,137.5 r0 top
R11 "220R" "0603 MLCC" 237.275,137.5 r0 top
R12 "220R" "0603 MLCC" 259.275,137.5 r0 top
R13 "220R" "0603 MLCC" 282.275,137.5 r0 top
R14 "10K" "0603 Resistors" 21.05,156.225 r270 top
R15 "10K" "0603 Resistors" 44.05,156.225 r270 top
R16 "10K" "0603 Resistors" 66.05,156.225 r270 top
R17 "10K" "0603 Resistors" 88.05,156.225 r270 top
R18 "10K" "0603 Resistors" 110.05,156.225 r270 top
R19 "10K" "0603 Resistors" 132.05,156.225 r270 top
R20 "10K" "0603 Resistors" 154.05,156.225 r270 top
R21 "10K" "0603 Resistors" 176.05,156.225 r270 top
R22 "10K" "0603 Resistors" 198.05,156.225 r270 top
R23 "10K" "0603 Resistors" 220.05,156.225 r270 top
R24 "10K" "0603 Resistors" 242.05,156.225 r270 top
R25 "10K" "0603 Resistors" 264.05,156.225 r270 top
R26 "10K" "0603 Resistors" 287.05,156.225 r270 top
R27 "220R" "0603 MLCC" 16.275,115.5 r0 top
R28 "220R" "0603 MLCC" 39.275,115.5 r0 top
R29 "220R" "0603 MLCC" 61.275,115.5 r0 top
R30 "220R" "0603 MLCC" 83.275,115.5 r0 top
R31 "220R" "0603 MLCC" 105.275,115.5 r0 top
R32 "220R" "0603 MLCC" 127.275,115.5 r0 top
R33 "220R" "0603 MLCC" 149.275,115.5 r0 top
R34 "220R" "0603 MLCC" 171.275,115.5 r0 top
R35 "220R" "0603 MLCC" 193.275,115.5 r0 top
R36 "220R" "0603 MLCC" 215.275,115.5 r0 top
R37 "220R" "0603 MLCC" 237.275,115.5 r0 top
R38 "220R" "0603 MLCC" 259.275,115.5 r0 top
R39 "220R" "0603 MLCC" 282.275,115.5 r0 top
R40 "10K" "0603 Resistors" 20.767,134.225 r270 top
R41 "10K" "0603 Resistors" 44.05,134.225 r270 top
R42 "10K" "0603 Resistors" 66.05,134.225 r270 top
R43 "10K" "0603 Resistors" 88.05,134.225 r270 top
R44 "10K" "0603 Resistors" 110.05,134.225 r270 top
R45 "10K" "0603 Resistors" 132.05,134.225 r270 top
R46 "10K" "0603 Resistors" 154.05,134.225 r270 top
R47 "10K" "0603 Resistors" 176.05,134.225 r270 top
R48 "10K" "0603 Resistors" 198.05,134.225 r270 top
R49 "10K" "0603 Resistors" 220.05,134.225 r270 top
R50 "10K" "0603 Resistors" 242.05,134.225 r270 top
R51 "10K" "0603 Resistors" 264.05,134.225 r270 top
R52 "10K" "0603 Resistors" 287.05,134.225 r270 top
R53 "220R" "0603 MLCC" 16.275,92.503 r0 top
R54 "220R" "0603 MLCC" 39.275,92.503 r0 top
R55 "220R" "0603 MLCC" 61.275,92.503 r0 top
R56 "220R" "0603 MLCC" 83.275,92.503 r0 top
R57 "220R" "0603 MLCC" 105.275,92.503 r0 top
R58 "220R" "0603 MLCC" 127.275,92.503 r0 top
R59 "220R" "0603 MLCC" 149.275,92.503 r0 top
R60 "220R" "0603 MLCC" 171.275,92.503 r0 top
R61 "220R" "0603 MLCC" 193.275,92.503 r0 top
R62 "220R" "0603 MLCC" 215.275,92.503 r0 top
R63 "220R" "0603 MLCC" 237.275,92.503 r0 top
R64 "220R" "0603 MLCC" 259.275,92.503 r0 top
R65 "220R" "0603 MLCC" 282.275,92.503 r0 top
R66 "10K" "0603 Resistors" 20.869,112.225 r270 top
R67 "10K" "0603 Resistors" 44.05,112.225 r270 top
R68 "10K" "0603 Resistors" 66.05,112.225 r270 top
R69 "10K" "0603 Resistors" 88.05,112.225 r270 top
R70 "10K" "0603 Resistors" 110.05,112.225 r270 top
R71 "10K" "0603 Resistors" 132.05,112.225 r270 top
R72 "10K" "0603 Resistors" 154.05,112.225 r270 top
R73 "10K" "0603 Resistors" 176.05,112.225 r270 top
R74 "10K" "0603 Resistors" 198.05,112.225 r270 top
R75 "10K" "0603 Resistors" 220.05,112.225 r270 top
R76 "10K" "0603 Resistors" 242.05,112.225 r270 top
R77 "10K" "0603 Resistors" 264.05,112.225 r270 top
R78 "10K" "0603 Resistors" 287.05,112.225 r270 top
R79 "220R" "0603 MLCC" 16.275,71.5 r0 top
R80 "220R" "0603 MLCC" 39.275,71.5 r0 top
R81 "220R" "0603 MLCC" 61.275,71.5 r0 top
R82 "220R" "0603 MLCC" 83.275,71.5 r0 top
R83 "220R" "0603 MLCC" 105.275,71.5 r0 top
R84 "220R" "0603 MLCC" 127.275,71.5 r0 top
R85 "220R" "0603 MLCC" 149.275,71.5 r0 top
R86 "220R" "0603 MLCC" 171.275,71.5 r0 top
R87 "220R" "0603 MLCC" 193.275,71.5 r0 top
R88 "220R" "0603 MLCC" 215.275,71.5 r0 top
R89 "220R" "0603 MLCC" 237.275,71.5 r0 top
R90 "220R" "0603 MLCC" 259.275,71.5 r0 top
R91 "220R" "0603 MLCC" 282.275,71.5 r0 top
R92 "10K" "0603 Resistors" 21.326,90.025 r270 top
R93 "10K" "0603 Resistors" 44.05,90.025 r270 top
R94 "10K" "0603 Resistors" 66.05,90.025 r270 top
R95 "10K" "0603 Resistors" 88.05,90.025 r270 top
R96 "10K" "0603 Resistors" 110.05,90.025 r270 top
R97 "10K" "0603 Resistors" 132.05,90.025 r270 top
R98 "10K" "0603 Resistors" 154.05,90.025 r270 top
R99 "10K" "0603 Resistors" 176.05,90.025 r270 top
R100 "10K" "0603 Resistors" 198.05,90.025 r270 top
R101 "10K" "0603 Resistors" 220.05,90.025 r270 top
R102 "10K" "0603 Resistors" 242.05,90.025 r270 top
R103 "10K" "0603 Resistors" 264.05,90.025 r270 top
R104 "10K" "0603 Resistors" 287.05,90.025 r270 top
R105 "220R" "0603 MLCC" 16.275,49.5 r0 top
R106 "220R" "0603 MLCC" 39.275,49.5 r0 top
R107 "220R" "0603 MLCC" 61.275,49.5 r0 top
R108 "220R" "0603 MLCC" 83.275,49.5 r0 top
R109 "220R" "0603 MLCC" 105.275,49.5 r0 top
R110 "220R" "0603 MLCC" 127.275,49.5 r0 top
R111 "220R" "0603 MLCC" 149.275,49.5 r0 top
R112 "220R" "0603 MLCC" 171.275,49.5 r0 top
R113 "220R" "0603 MLCC" 193.275,49.5 r0 top
R114 "220R" "0603 MLCC" 215.275,49.5 r0 top
R115 "220R" "0603 MLCC" 237.275,49.5 r0 top
R116 "220R" "0603 MLCC" 259.275,49.5 r0 top
R117 "220R" "0603 MLCC" 282.275,49.5 r0 top
R118 "10K" "0603 Resistors" 21.275,68.225 r270 top
R119 "10K" "0603 Resistors" 44.05,68.225 r270 top
R120 "10K" "0603 Resistors" 66.05,68.225 r270 top
R121 "10K" "0603 Resistors" 88.05,68.225 r270 top
R122 "10K" "0603 Resistors" 110.05,68.225 r270 top
R123 "10K" "0603 Resistors" 132.05,68.225 r270 top
R124 "10K" "0603 Resistors" 154.05,68.225 r270 top
R125 "10K" "0603 Resistors" 176.05,68.225 r270 top
R126 "10K" "0603 Resistors" 198.05,68.225 r270 top
R127 "10K" "0603 Resistors" 220.05,68.225 r270 top
R128 "10K" "0603 Resistors" 242.05,68.225 r270 top
R129 "10K" "0603 Resistors" 264.05,68.225 r270 top
R130 "10K" "0603 Resistors" 287.05,68.225 r270 top
R131 "220R" "0603 MLCC" 16.275,27.5 r0 top
R132 "220R" "0603 MLCC" 39.275,27.5 r0 top
R133 "220R" "0603 MLCC" 61.275,27.5 r0 top
R134 "220R" "0603 MLCC" 83.275,27.5 r0 top
R135 "220R" "0603 MLCC" 105.275,27.5 r0 top
R136 "220R" "0603 MLCC" 127.275,27.5 r0 top
R137 "220R" "0603 MLCC" 149.275,27.5 r0 top
R138 "220R" "0603 MLCC" 171.275,27.5 r0 top
R139 "220R" "0603 MLCC" 193.275,27.5 r0 top
R140 "220R" "0603 MLCC" 215.275,27.5 r0 top
R141 "220R" "0603 MLCC" 237.275,27.5 r0 top
R142 "220R" "0603 MLCC" 259.275,27.5 r0 top
R143 "220R" "0603 MLCC" 282.275,27.5 r0 top
R144 "10K" "0603 Resistors" 21.05,46.225 r270 top
R145 "10K" "0603 Resistors" 44.05,46.225 r270 top
R146 "10K" "0603 Resistors" 66.05,46.225 r270 top
R147 "10K" "0603 Resistors" 88.05,46.225 r270 top
R148 "10K" "0603 Resistors" 110.05,46.225 r270 top
R149 "10K" "0603 Resistors" 132.05,46.225 r270 top
R150 "10K" "0603 Resistors" 154.05,46.225 r270 top
R151 "10K" "0603 Resistors" 176.05,46.225 r270 top
R152 "10K" "0603 Resistors" 198.05,46.225 r270 top
R153 "10K" "0603 Resistors" 220.05,46.225 r270 top
R154 "10K" "0603 Resistors" 242.05,46.225 r270 top
R155 "10K" "0603 Resistors" 264.05,46.225 r270 top
R156 "10K" "0603 Resistors" 287.05,46.225 r270 top
R157 "220R" "0603 MLCC" 16.275,5.5 r0 top
R158 "220R" "0603 MLCC" 39.275,5.5 r0 top
R159 "220R" "0603 MLCC" 61.275,5.5 r0 top
R160 "220R" "0603 MLCC" 83.275,5.5 r0 top
R161 "220R" "0603 MLCC" 105.275,5.5 r0 top
R162 "220R" "0603 MLCC" 127.275,5.5 r0 top
R163 "220R" "0603 MLCC" 149.275,5.5 r0 top
R164 "220R" "0603 MLCC" 171.275,5.5 r0 top
R165 "220R" "0603 MLCC" 193.275,5.5 r0 top
R166 "220R" "0603 MLCC" 215.275,5.5 r0 top
R167 "220R" "0603 MLCC" 237.275,5.5 r0 top
R168 "220R" "0603 MLCC" 259.275,5.5 r0 top
R169 "220R" "0603 MLCC" 282.275,5.5 r0 top
R170 "10K" "0603 Resistors" 21.072,24.225 r270 top
R171 "10K" "0603 Resistors" 44.05,24.225 r270 top
R172 "10K" "0603 Resistors" 66.05,24.225 r270 top
R173 "10K" "0603 Resistors" 88.05,24.225 r270 top
R174 "10K" "0603 Resistors" 110.05,24.225 r270 top
R175 "10K" "0603 Resistors" 132.05,24.225 r270 top
R176 "10K" "0603 Resistors" 154.05,24.225 r270 top
R177 "10K" "0603 Resistors" 176.05,24.225 r270 top
R178 "10K" "0603 Resistors" 198.05,24.225 r270 top
R179 "10K" "0603 Resistors" 220.05,24.225 r270 top
R180 "10K" "0603 Resistors" 242.05,24.225 r270 top
R181 "10K" "0603 Resistors" 264.05,24.225 r270 top
R182 "10K" "0603 Resistors" 287.05,24.225 r270 top
R183 "10K" "0603 Resistors" 12.227,5.5 r180 top
R184 "10K" "0603 Resistors" 35.225,5.5 r180 top
R185 "10K" "0603 Resistors" 57.225,5.5 r180 top
R186 "10K" "0603 Resistors" 79.225,5.5 r180 top
R187 "10K" "0603 Resistors" 101.225,5.5 r180 top
R188 "10K" "0603 Resistors" 123.225,5.5 r180 top
R189 "10K" "0603 Resistors" 145.225,5.5 r180 top
R190 "10K" "0603 Resistors" 167.225,5.5 r180 top
R191 "10K" "0603 Resistors" 189.225,5.5 r180 top
R192 "10K" "0603 Resistors" 211.225,5.5 r180 top
R193 "10K" "0603 Resistors" 233.225,5.5 r180 top
R194 "10K" "0603 Resistors" 255.225,5.5 r180 top
R195 "10K" "0603 Resistors" 278.225,5.5 r180 top
R196 "10K" "0603 Resistors" 277.603,181.426 r270 top
R197 "220R" "0603 Resistors" 275.063,181.426 r90 top
R198 "10K" "0603 Resistors" 255.422,181.426 r270 top
R199 "220R" "0603 Resistors" 251.308,181.426 r90 top
R200 "220R" "0603 Resistors" 226.91,181.559 r0 top
R201 "100K" "0603 Resistors" 246.959,226.602 r90 top
R202 "150K" "0603 Resistors" 248.483,226.602 r270 top
R203 "2.2R" "0603 Resistors" 258.897,222.337 r0 top
R204 "1K" "0603 Resistors" 260.347,220.896 r0 top
R205 "10K" "0603 Resistors" 241.117,223.012 r90 top
R206 "100K" "0603 Resistors" 256.154,218.24 r270 top
R207 "10K" "0603 Resistors" 249.358,215.741 r0 top
R208 "3K" "0603 Resistors" 254.521,218.24 r90 top
R209 "30K" "0603 Resistors" 191.843,239.293 r90 top
R210 "5.6K" "0603 Resistors" 187.525,234.826 r90 top value=5.1K
R211 "150K" "0603 Resistors" 198.861,239.293 r270 top
R212 "5.6K" "0603 Resistors" 193.461,239.293 r270 top
R213 "10K" "0603 Resistors" 101.372,194.488 r180 top
R214 "150K" "0603 Resistors" 101.372,197.485 r180 top
R215 "10K" "0603 Resistors" 220.714,220.065 r180 top
R216 "1K" "0603 Resistors" 220.714,222.969 r180 top
R217 "1K" "0603 Resistors" 220.714,221.519 r180 top
R218 "10K" "0603 Resistors" 223.025,222.244 r90 top
R219 "220K" "0603 Resistors" 230.791,222.744 r90 top
R220 "2.2R" "0603 Resistors" 231.458,216.738 r180 top
R221 "1K" "0603 Resistors" 222.3,217.688 r180 top
R222 "10K" "0603 Resistors" 222.3,215.788 r0 top
R223 "10K" "0603 Resistors" 120.731,235.001 r180 top
R224 "10K" "0603 Resistors" 111.781,235.001 r180 top
R225 "0R" "0603 Resistors" 142.9,181.712 r180 top
RSNS1 "25mR 1W" "1206 Resistor" 264.566,221.92 r90 top
SW1 "HX 3x6x2.5A-2.5N" "SW - 2P SMD" 116.256,239.27 r180 top
U1 "74HC595 SMD" "SOP 16" 24.83,169.999 r90 top
U2 "74HC595 SMD" "SOP 16" 47.83,169.999 r90 top
U3 "74HC595 SMD" "SOP 16" 69.83,169.999 r90 top
U4 "74HC595 SMD" "SOP 16" 91.83,169.999 r90 top
U5 "74HC595 SMD" "SOP 16" 113.83,169.999 r90 top
U6 "74HC595 SMD" "SOP 16" 135.83,169.999 r90 top
U7 "74HC595 SMD" "SOP 16" 157.83,169.999 r90 top
U8 "74HC595 SMD" "SOP 16" 179.83,169.999 r90 top
U9 "74HC595 SMD" "SOP 16" 201.83,169.999 r90 top
U10 "74HC595 SMD" "SOP 16" 223.83,169.999 r90 top
U11 "74HC595 SMD" "SOP 16" 245.83,169.999 r90 top
U12 "74HC595 SMD" "SOP 16" 290.83,169.999 r90 top
U13 "74HC595 SMD" "SOP 16" 267.83,169.999 r90 top
U14 "TPS40210" "MSOP 10" 252.267,222.337 r0 top
U15 "TPS54360DDAR" SOIC8 196.161,233.451 r180 top
U16 "AMS1117-3.3V" "SOT223 - 4P" 152.095,188.519 r90 top
U17 "STM32F407xx-LQFP100" STM32_LQFP100 114.605,204.775 r0 top
X1 "8Mhz" "5032 4P" 95.885,204.175 r0 top

## Footprints (in the part's own frame and the unit in brackets; to place one, negate y for a bottom-side part, rotate by r counter-clockwise, add the part's x,y. Pads: shape width x height; smd on the part's side, far side on the other; paste and mask are expansions set on the pad)
"10x20 5.0 Capacitor" [mm]
  rrect50% 2.1x2.1 hole 0.9: 1(0,0)
  round 2.1 hole 0.9: 2(5.08,0)
  silkscreen extent -2.41,-4.96 7.47,4.92, body extent -2.46,-5 7.51,5, height 20.01
12.2x12.2mm [mm]
  rrect50% 3.2x5.5 smd: 1(-5.05,0) 2(5.05,0)
  silkscreen extent -6.25,-6.25 6.25,6.25, body extent -6,-6 6,6, height 7.42
"0603 MLCC" [mm]
  rrect50% 0.65x0.9 smd paste+0 mask+0.102: 1(-0.725,0) 2(0.725,0)
  silkscreen extent -0.15,-0.4 0.15,0.4, body extent -0.8,-0.4 0.8,0.4, height 0.87
"0603 Resistors" [mm]
  rrect50% 0.65x0.9 smd paste+0 mask+0.102: 1(-0.725,0) 2(0.725,0)
  silkscreen extent -0.15,-0.4 0.15,0.4, body extent -0.8,-0.4 0.8,0.4, height 0.45
"1206 - Fuse" [mm]
  rrect30% 1x1.5 smd: 1(-1.5,0) 2(1.5,0)
  silkscreen extent -1.75,-1 1.75,1, body extent -1.7,-0.85 1.7,0.85, height 0.8
"1206 Resistor" [mm]
  rrect50% 1.3x1.6 smd: 1(-1.5,0) 2(1.5,0)
  silkscreen extent -0.5,-0.75 0.5,0.75, body extent -1.6,-0.8 1.6,0.8, height 0.6
"1210 CAPACITOR" [mm]
  rrect50% 1.32x2.81 smd paste+0 mask+0.102: 1(-1.542,0) 2(1.542,0)
  silkscreen extent -0.56,-1.4 0.56,1.4, body extent -1.65,-1.25 1.65,1.25, height 2.79
"5032 4P" [mm]
  rrect30% 1.6x1.25 smd: 1(-1.85,-1.1) 2(1.85,-1.1) 3(1.85,1.1) 4(-1.85,1.1)
  silkscreen extent -2.5,-1.6 2.5,1.6, body extent -2.5,-1.6 2.5,1.6, height 0.85
"E32 - 433T30D" [mm]
  rect 1.8x1.8 hole 1: 0(38.5,-7.43)
  round 1.8 hole 1: 0(38.5,-4.89) 0(38.5,-2.35) 0(38.5,0.19) 1(0,0) 2(0,-2.54) 3(0,-5.08) 4(0,-7.62) 5(0,-10.16) 6(0,-12.7) 7(0,-15.24)
  silkscreen extent -1.5,-19.62 51.35,4.38, body extent -1.52,-19.62 54.18,4.38, height 8.37
"Metal Push Button Switch" [mm]
  oval 3.7x1.4 hole 0.8 slot 3.1 at 0 deg: 1(0,4.05) 2(0,-4.05)
  oval 1.4x2.9 hole 0.8 slot 2.3 at 90 deg: 3(-1.9,0) 4(1.9,0)
  silkscreen extent -7,-7 7,7
"MSOP 10" [mil]
  rrect50% 55x11 smd paste+0 mask+4.02: 1(-86,39.4) 2(-86,19.7) 3(-86,0) 4(-86,-19.7) 5(-86,-39.4) 6(86,-39.4) 7(86,-19.7) 8(86,0) 9(86,19.7) 10(86,39.4)
  rrect10% 76x85 smd paste+0 mask+4.02: 11(0,0)
  silkscreen extent -134,-66 66,66, body extent -96,-59 96,59, height 43
SMC(DO-214AB) [mm]
  rrect50% 2.8x3.8 smd: 1(-3.7,0) 2(3.7,0)
  silkscreen extent -3.56,-3.11 3.56,3.11, body extent -3.97,-2.95 3.97,2.95, height 2.5
SOIC8 [mm]
  rrect10% 1.7x2.5 smd: 0(0,0)
  rrect30% 1.55x0.6 smd: 1(-2.7,1.95) 2(-2.7,0.65) 3(-2.7,-0.65) 4(-2.7,-1.95) 5(2.7,-1.95) 6(2.7,-0.65) 7(2.7,0.65) 8(2.7,1.9)
  silkscreen extent -3.5,-2.6 1.5,2.7, body extent -3,-2.4 3,2.5, height 1.5
"SOP 16" [mm]
  oval 2x0.55 smd: 1(-2.7,4.445) 2(-2.7,3.175) 3(-2.7,1.905) 4(-2.7,0.635) 5(-2.7,-0.635) 6(-2.7,-1.905) 7(-2.7,-3.175) 8(-2.7,-4.445) 9(2.7,-4.445) 10(2.7,-3.175) 11(2.7,-1.905) 12(2.7,-0.635) 13(2.7,0.635) 14(2.7,1.905) 15(2.7,3.175) 16(2.7,4.445)
  silkscreen extent -2.82,-4.95 1.55,5.39, body extent -3,-4.95 3,4.95, height 1.4
"SOP Advanced" [mm]
  rect 1.45x0.85 smd: 1(2.944,-1.905) 2(2.944,-0.635) 3(2.944,0.635) 4(2.944,1.905) 5(-2.944,1.905) 6(-2.944,0.635) 7(-2.944,-0.635) 8(-2.944,-1.905)
  rect 3.505x4.7 smd: TAB(-0.738,-0.016)
  silkscreen extent -2.7,-2.6 5.28,2.67, body extent -3.05,-2.65 2.95,2.65, height 1
SOT23_HVT [mm]
  rrect30% 0.7x1 smd: 1(0,0.05) 2(1.9,0.05) 3(0.95,2.35)
  silkscreen extent -0.5,0.8 2.4,1.6, body extent -0.5,0 2.4,2.4, height 1
"SOT223 - 4P" [mil]
  rect 39x59 smd: 1(-90.55,-124) 2(0,-124) 3(90.55,-124)
  rect 129x59 smd: 4(0,124)
  silkscreen extent -138,-181 138,163, body extent -128,-138 128,138, height 71
STM32_LQFP100 [mm]
  oval 1.45x0.3 smd: 1(-7.725,6) 2(-7.725,5.5) 3(-7.725,5) 4(-7.725,4.5) 5(-7.725,4) 6(-7.725,3.5) 7(-7.725,3) 8(-7.725,2.5) 9(-7.725,2) 10(-7.725,1.5) 11(-7.725,1) 12(-7.725,0.5) 13(-7.725,0) 14(-7.725,-0.5) 15(-7.725,-1) 16(-7.725,-1.5) 17(-7.725,-2) 18(-7.725,-2.5) 19(-7.725,-3) 20(-7.725,-3.5) 21(-7.725,-4) 22(-7.725,-4.5) 23(-7.725,-5) 24(-7.725,-5.5) 25(-7.725,-6) 51(7.725,-6) 52(7.725,-5.5) 53(7.725,-5) 54(7.725,-4.5) 55(7.725,-4) 56(7.725,-3.5) 57(7.725,-3) 58(7.725,-2.5) 59(7.725,-2) 60(7.725,-1.5) 61(7.725,-1) 62(7.725,-0.5) 63(7.725,0) 64(7.725,0.5) 65(7.725,1) 66(7.725,1.5) 67(7.725,2) 68(7.725,2.5) 69(7.725,3) 70(7.725,3.5) 71(7.725,4) 72(7.725,4.5) 73(7.725,5) 74(7.725,5.5) 75(7.725,6)
  oval 0.3x1.45 smd: 26(-6,-7.725) 27(-5.5,-7.725) 28(-5,-7.725) 29(-4.5,-7.725) 30(-4,-7.725) 31(-3.5,-7.725) 32(-3,-7.725) 33(-2.5,-7.725) 34(-2,-7.725) 35(-1.5,-7.725) 36(-1,-7.725) 37(-0.5,-7.725) 38(0,-7.725) 39(0.5,-7.725) 40(1,-7.725) 41(1.5,-7.725) 42(2,-7.725) 43(2.5,-7.725) 44(3,-7.725) 45(3.5,-7.725) 46(4,-7.725) 47(4.5,-7.725) 48(5,-7.725) 49(5.5,-7.725) 50(6,-7.725) 76(6,7.725) 77(5.5,7.725) 78(5,7.725) 79(4.5,7.725) 80(4,7.725) 81(3.5,7.725) 82(3,7.725) 83(2.5,7.725) 84(2,7.725) 85(1.5,7.725) 86(1,7.725) 87(0.5,7.725) 88(0,7.725) 89(-0.5,7.725) 90(-1,7.725) 91(-1.5,7.725) 92(-2,7.725) 93(-2.5,7.725) 94(-3,7.725) 95(-3.5,7.725) 96(-4,7.725) 97(-4.5,7.725) 98(-5,7.725) 99(-5.5,7.725) 100(-6,7.725)
  silkscreen extent -7.85,-6.6 6.6,6.82, body extent -8,-8 8,8, height 1.6
"SW - 2P SMD" [mm]
  rrect50% 1.6x1.2 smd: 1(-3.75,0) 2(3.75,0)
  silkscreen extent -2.95,-1.85 2.95,1.85, body extent -4,-1.8 4,1.8, height 2.5
"TO - 252" [mm]
  rrect50% 1.4x2.29 smd: 1(-2.285,-4.19) 3(2.285,-4.19)
  rrect30% 5.69x7 smd paste-4: 2(0,2.495)
  silkscreen extent -3.5,-1.75 3.5,3.75, body extent -3.36,-4.79 3.36,5.63, height 2.75
"XH2.54 - 4PZZ" [mm]
  rrect50% 1.6x1.6 hole 0.9: 1(0,0)
  round 1.6 hole 0.9: 2(2.54,0) 3(5.08,0) 4(7.62,0)
  silkscreen extent -2.48,-2.26 10.1,3.46, body extent -2.48,-2.26 10.1,3.48, height 6.91
XH2.54M-7 [mm]
  rect 1.6x1.6 hole 0.8: 1(0,0)
  round 1.6 hole 0.8: 2(2.54,0) 3(5.08,0) 4(7.62,0) 5(10.16,0) 6(12.7,0) 7(15.24,0)
  silkscreen extent -2.48,-2.26 17.72,3.46, body extent -2.48,-2.26 17.72,3.48, height 6.91
XT30 [mm]
  round 2 hole 1: 0(-3,10) 0(8,10)
  rrect50% 3.5x5 hole 1.7: 1(0,0)
  oval 3.5x5 hole 1.7: 2(5,0)
  silkscreen extent -4.5,-3 9.5,13, body extent -4.15,-1 9.15,12.95, height 5